# EAGLE board Cautin (EAGLE 9.6.2)

Size 100 x 80 mm. Coordinates in mm from the lower left corner, seen from the top.
Outline: 0,0 100,0 100,80 0,80 0,0
Copper layers (1*16): Top 0.035mm / dielectric 1.5mm / Bottom 0.035mm
Design rules "default": minimum track width 6mil, minimum drill 0.35mm, track to track 6mil, track to pad 6mil, pad to pad 6mil, via to via 6mil, smd to smd 6mil, copper to edge 40mil, drill to drill 6mil, minimum pad ring 10mil, minimum via ring 8mil, stop-mask expansion 4mil, vias tented up to drill 0mil, thermal gap 10mil

## Footprints (pad centres in the part's own frame; a part is rotated, then mirrored left to right if it is on the bottom)
TO92-EBC = drill 0.813 long: B 0,-1.27; C 2.54,-1.27; E -2.54,-1.27
AK300/2 = drill 1.321 long: 1 -2.515,0; 2 2.489,0
C025-024X044 = drill 0.813 octagon: 1 -1.27,0; 2 1.27,0
TO220V = drill 1.016 long: 1 -2.54,-2.54; 2 0,-2.54; 3 2.54,-2.54
DIL08 = drill 0.813 pad 1.27: 1 -3.81,-3.81; 2 -1.27,-3.81; 3 1.27,-3.81; 4 3.81,-3.81; 5 3.81,3.81; 6 1.27,3.81; 7 -1.27,3.81; 8 -3.81,3.81
DIL06 = drill 0.813 offset: 1 -2.54,-3.81; 2 0,-3.81; 3 2.54,-3.81; 4 2.54,3.81; 5 0,3.81; 6 -2.54,3.81
TO220AH = drill 1.118 long: B -2.54,-6.35; C 0,-6.35; E 2.54,-6.35 | hole 3.302: 0,11.176
0207/12 = drill 0.813 octagon: 1 -6.35,0; 2 6.35,0
0207/15 = drill 0.813 octagon: 1 -7.62,0; 2 7.62,0

## Placement (x,y rotation side)
2N2222  [TO92-EBC]  -41.91,49.53 0 top  (outside the outline)
24V  [AK300/2]  12.7,11.43 180 top
C1  [C025-024X044]  -30.48,68.58 0 top  (outside the outline)
C2  [C025-024X044]  -35.56,68.58 0 top  (outside the outline)
CAUTIN  [AK300/2]  -69.85,-59.69 0 top  (outside the outline)
FUSIBLE  [AK300/2]  -69.85,-43.18 0 top  (outside the outline)
IC1  7805TV  [TO220V]  -31.75,54.61 0 top  (outside the outline)
IC2  LM358N  [DIL08]  -19.05,52.07 0 top  (outside the outline)
OK1  4N26M  [DIL06]  -30.48,6.35 0 top  (outside the outline)
PIN_PWM  [AK300/2]  8.89,72.39 0 top
Q1  IRF3704  [TO220AH]  -20.32,8.89 0 top  (outside the outline)
R1  [0207/12]  -20.32,58.42 0 top  (outside the outline)
R2  [0207/12]  -35.56,58.42 0 top  (outside the outline)
R3  [0207/12]  -50.8,58.42 0 top  (outside the outline)
R4  [0207/12]  -20.32,63.5 0 top  (outside the outline)
R5  [0207/12]  -35.56,63.5 0 top  (outside the outline)
R6  [0207/15]  -54.61,48.26 0 top  (outside the outline)
R7  [0207/12]  -50.8,63.5 0 top  (outside the outline)
R8  [0207/12]  13.97,57.15 0 top
R_SENSOR_CAUTIN  [AK300/2]  27.94,58.42 0 top
V_MICRO  [AK300/2]  -69.85,-92.71 0 top  (outside the outline)
V_SENSOR_TEMP  [AK300/2]  -69.85,-76.2 0 top  (outside the outline)

## Library data of the parts
2N2222 = transistor-neu-to92
24V CAUTIN FUSIBLE PIN_PWM R_SENSOR_CAUTIN V_MICRO V_SENSOR_TEMP = con-ptr500; OC_FARNELL: unknown; OC_NEWARK: unknown
C1 C2 = rcl; SPICEPREFIX: C
IC1 IC2 = linear
OK1 = optocoupler; MPN: 4N26-M; OC_FARNELL: 1021350; OC_NEWARK: 98K9089
Q1 = transistor-power
R1-R8 = rcl; SPICEPREFIX: R

## Nets
N$1: OK1.1 PIN_PWM.1
N$3: C2.1 IC1.1 R5.2
N$4: 24V.1 FUSIBLE.1
N$5: 24V.2 C1.2 C2.2 IC1.2 OK1.4 Q1.E R1.2
N$6: OK1.5 R3.1 R5.1
N$7: 2N2222.B R3.2
N$8: 2N2222.E R1.1 R2.1
N$9: Q1.B R2.2
N$10: CAUTIN.2 Q1.C
N$11: IC2.2 R4.1 R7.2
N$12: IC2.3 R8.1 R_SENSOR_CAUTIN.1
N$13: 2N2222.C R6.1
N$14: IC2.1 R4.2 V_SENSOR_TEMP.1
N$15: C1.1 CAUTIN.1 FUSIBLE.2 IC1.3 R6.2
N$16: OK1.2 PIN_PWM.2 R7.1 R_SENSOR_CAUTIN.2 V_MICRO.2 V_SENSOR_TEMP.2
N$17: R8.2 V_MICRO.1
V+: IC2.8
V-: IC2.4

## Tracks (layer width: path | path; a pad name or v marks a point on that pad's centre or on a via)
N$1  (1 unrouted)
N$3  (2 unrouted)
N$4  (1 unrouted)
N$5  (6 unrouted)
N$6  (2 unrouted)
N$7  (1 unrouted)
N$8  (2 unrouted)
N$9  (1 unrouted)
N$10  (1 unrouted)
N$11  (2 unrouted)
N$12  (2 unrouted)
N$13  (1 unrouted)
N$14  (2 unrouted)
N$15  (4 unrouted)
N$16  (5 unrouted)
N$17  (1 unrouted)